# Altium PCB CH32V307V-R0-1v0.PcbDoc (part 3 of 3)
Units mil, origin at the board's own origin, x right, y up, seen from the top; angles counter-clockwise.
Board outline 3661.42 x 3267.72 mil, 2 copper layers (Top Layer, Bottom Layer); 68 components, 119 nets, 417 pads, 746 vias.
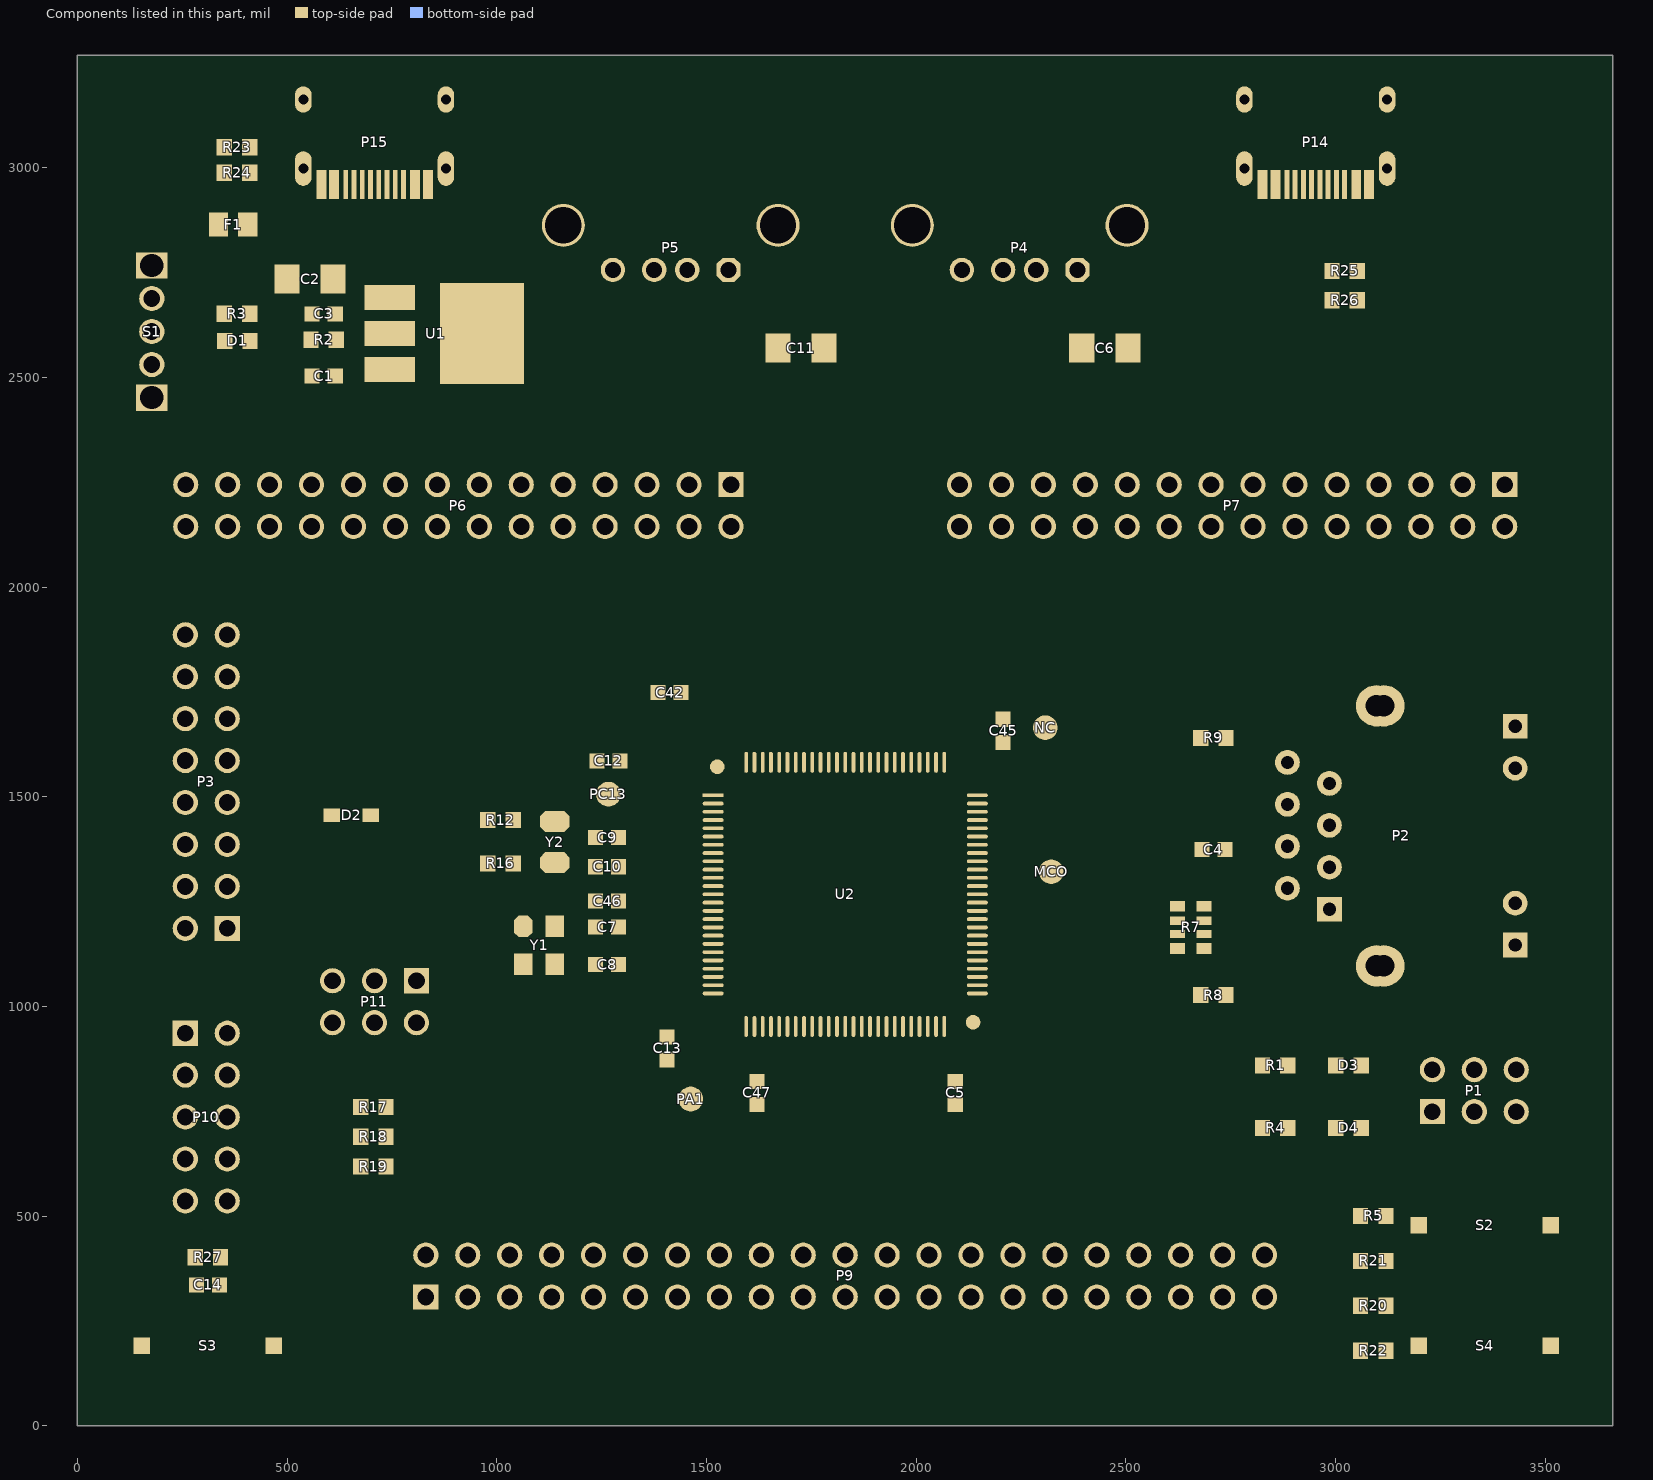
[diagram p3: the components of this part, seen from the top]

## Silkscreen, mask and mechanical layers (free items; w line width, h text height)
Top Overlay:
  lines w10: 471.12,1226.78 471.12,1838.79
  text "OFF" at 24.62,2711.6 h32 r270
  text "ON" at 24.62,2573.76 h32 r270
  text "CH32V307V-R0-1v0" at 2720.16,2529.81 h45
  text "PC12" at 2682.57,2465.31 h35 r270
  text "PC10" at 2782.58,2465.31 h35 r270
  text "PA14" at 2882.59,2465.31 h35 r270
  text "PA12" at 2982.6,2465.31 h35 r270
  text "PA10" at 3082.61,2465.31 h35 r270
  text "PC15" at 731.68,2438.82 h35 r270
  text "PC13" at 831.81,2438.82 h35 r270
  text "PB6" at 2082.53,2436.15 h35 r270
  text "PB4" at 2182.54,2436.15 h35 r270
  text "PD7" at 2282.54,2436.15 h35 r270
  text "PD5" at 2382.55,2436.15 h35 r270
  text "PD3" at 2482.56,2436.15 h35 r270
  text "PA8" at 3182.61,2436.15 h35 r270
  text "PC8" at 3282.62,2436.15 h35 r270
  text "PC6" at 3382.63,2436.15 h35 r270
  text "PD1" at 2582.57,2424.49 h35 r270
  text "GND" at 230.13,2409.67 h35 r270
  text "GND" at 330.27,2409.67 h35 r270
  text "PC3" at 531.4,2409.67 h35 r270
  text "PE5" at 931.95,2409.67 h35 r270
  text "PE3" at 1032.09,2409.67 h35 r270
  text "PB9" at 1232.36,2409.67 h35 r270
  text "GND" at 1331.27,2409.67 h35 r270
  text "VIO" at 1431.96,2403.83 h35 r270
  text "VIO" at 1536.38,2403.83 h35 r270
  text "PA1" at 434.68,2398 h35 r270
  text "PC1" at 631.54,2398 h35 r270
  text "PE1" at 1132.22,2398 h35 r270
  text "GND" at 238.88,2082.05 h35 r270
  text "GND" at 339.18,2082.05 h35 r270
  text "PA0" at 435.6,2082.05 h35 r270
  text "PC2" at 540.47,2082.05 h35 r270
  text "PC0" at 640.76,2082.05 h35 r270
  text "PC14" at 741.06,2082.05 h35 r270
  text "PE6" at 841.35,2082.05 h35 r270
  text "PE4" at 941.65,2082.05 h35 r270
  text "PE2" at 1041.94,2082.05 h35 r270
  text "PE0" at 1142.23,2082.05 h35 r270
  text "PB8" at 1242.53,2082.05 h35 r270
  text "PB7" at 1342.82,2082.05 h35 r270
  text "VDD" at 1443.11,2082.05 h35 r270
  text "VDD" at 1543.41,2082.05 h35 r270
  text "GND" at 3186.63,2075.24 h35 r270
  text "PB5" at 2082.53,2072.13 h35 r270
  text "PB3" at 2182.89,2072.13 h35 r270
  text "PD6" at 2283.25,2072.13 h35 r270
  text "PD4" at 2383.61,2072.13 h35 r270
  text "PD2" at 2483.98,2072.13 h35 r270
  text "PD0" at 2584.34,2072.13 h35 r270
  text "PC11" at 2684.7,2072.13 h35 r270
  text "PA15" at 2785.06,2072.13 h35 r270
  text "PA13" at 2885.42,2072.13 h35 r270
  text "PA11" at 2985.79,2072.13 h35 r270
  text "PA9" at 3086.15,2072.13 h35 r270
  text "PC9" at 3285.16,2072.13 h35 r270
  text "PC7" at 3381.51,2072.13 h35 r270
  text "GND" at 423.05,1868.53 h35
  text "3V3" at 77.98,1863.31 h35
  text "3V3" at 77.98,1762.96 h35
  text "3V3" at 77.98,1662.61 h35
  text "5V" at 112.97,1562.26 h35
  text "5V" at 112.97,1461.91 h35
  text "5V" at 112.97,1361.56 h35
  text "GND" at 77.98,1261.21 h35
  text "VBAT" at 683.87,1261.1 h35 r270
  text "VDD" at 583.33,1226.12 h35 r270
  text "VIO" at 788.29,1220.28 h35 r270
  text "GND" at 423.05,1167.39 h35
  text "GND" at 77.98,1160.87 h35
  text "ELED2" at 3409.63,1075.36 h32 r270
  text "ELED1" at 3307.63,1064.69 h32 r270
  text "GND" at 3205.62,1011.38 h32 r270
  text "SWCK" at 39.8,914.85 h35
  text "TXD" at 428.53,912.72 h35
  text "3V3" at 580.11,902.35 h33 r270
  text "3V3" at 687.21,902.35 h33 r270
  text "3V3" at 785.82,902.35 h33 r270
  text "SWIO" at 45.63,814.12 h35
  text "RXD" at 428.53,814.1 h35
  text "GND" at 428.53,714.73 h35
  text "GND" at 74.79,713.39 h35
  text "LED1" at 3205.62,690.33 h32 r270
  text "LED2" at 3307.63,690.33 h32 r270
  text "KEY" at 3409.63,690.33 h32 r270
  text "BOOT1" at 908.09,645.05 h35 r270
  text "PE13" at 1808.96,621.21 h35 r270
  text "PE15" at 1909.06,621.21 h35 r270
  text "PB13" at 2109.25,621.21 h35 r270
  text "PB15" at 2209.35,621.21 h35 r270
  text "PD13" at 2509.64,621.21 h35 r270
  text "PD15" at 2609.73,621.21 h35 r270
  text "VDD" at 428.53,616.11 h35
  text "VDD" at 74.79,612.66 h35
  text "PE11" at 1708.86,609.55 h35 r270
  text "PB11" at 2009.15,609.55 h35 r270
  text "PD11" at 2409.54,609.55 h35 r270
  text "GND" at 807.99,592.05 h35 r270
  text "PA3" at 1008.19,592.05 h35 r270
  text "PA5" at 1108.28,592.05 h35 r270
  text "PA7" at 1208.38,592.05 h35 r270
  text "PC5" at 1308.48,592.05 h35 r270
  text "PE7" at 1508.67,592.05 h35 r270
  text "PE9" at 1608.77,592.05 h35 r270
  text "PD9" at 2309.44,592.05 h35 r270
  text "GND" at 2709.83,592.05 h35 r270
  text "GND" at 2809.93,592.05 h35 r270
  text "PB1" at 1408.57,580.39 h35 r270
  text "5V" at 109.78,511.93 h35
  text "5V" at 428.53,512.3 h35
  text "GND" at 807.99,217.56 h35 r270
  text "BOOT0" at 908.09,217.56 h35 r270
  text "PA2" at 1008.19,217.56 h35 r270
  text "PA4" at 1108.28,217.56 h35 r270
  text "PA6" at 1208.38,217.56 h35 r270
  text "PC4" at 1308.48,217.56 h35 r270
  text "PB0" at 1408.57,217.56 h35 r270
  text "PB2" at 1508.67,217.56 h35 r270
  text "PE8" at 1608.77,217.56 h35 r270
  text "PE10" at 1708.86,217.56 h35 r270
  text "PE12" at 1808.96,217.56 h35 r270
  text "PE14" at 1909.06,217.56 h35 r270
  text "PB10" at 2009.15,217.56 h35 r270
  text "PB12" at 2109.25,217.56 h35 r270
  text "PB14" at 2209.35,217.56 h35 r270
  text "PD8" at 2309.45,217.56 h35 r270
  text "PD10" at 2409.54,217.56 h35 r270
  text "PD12" at 2509.64,217.56 h35 r270
  text "PD14" at 2609.74,217.56 h35 r270
  text "GND" at 2709.83,217.56 h35 r270
  text "GND" at 2809.93,217.56 h35 r270
Mechanical 1:
  the board outline again, w10

## Text inside footprints (layer, text, board x,y; h text height)
D1: Top Overlay "+" at 312.76,2575.94 h40 r90
D3: Top Overlay "+" at 2962.13,848.37 h40 r90
D4: Top Overlay "+" at 2962.13,699.37 h40 r90
P4: Top Overlay "D-" at 2324.59,2876.36 h40 r180; Top Overlay "D+" at 2234.59,2876.36 h40 r180; Top Overlay "V" at 2404.59,2876.36 h40 r180; Top Overlay "G" at 2124.59,2876.36 h40 r180
P5: Top Overlay "G" at 1292.42,2876.36 h40 r180; Top Overlay "V" at 1572.42,2876.36 h40 r180; Top Overlay "D+" at 1402.42,2876.36 h40 r180; Top Overlay "D-" at 1492.42,2876.36 h40 r180